# Altium PCB MCUBoard_PCB.PcbDoc
Units mm, origin at the board's own origin, x right, y up, seen from the top; angles counter-clockwise.
Board outline 152.4 x 101.6 mm, 2 copper layers (Top Layer, Bottom Layer); 59 components, 55 nets, 230 pads, 0 vias.
Unrouted connection lines stored in the file: 151.
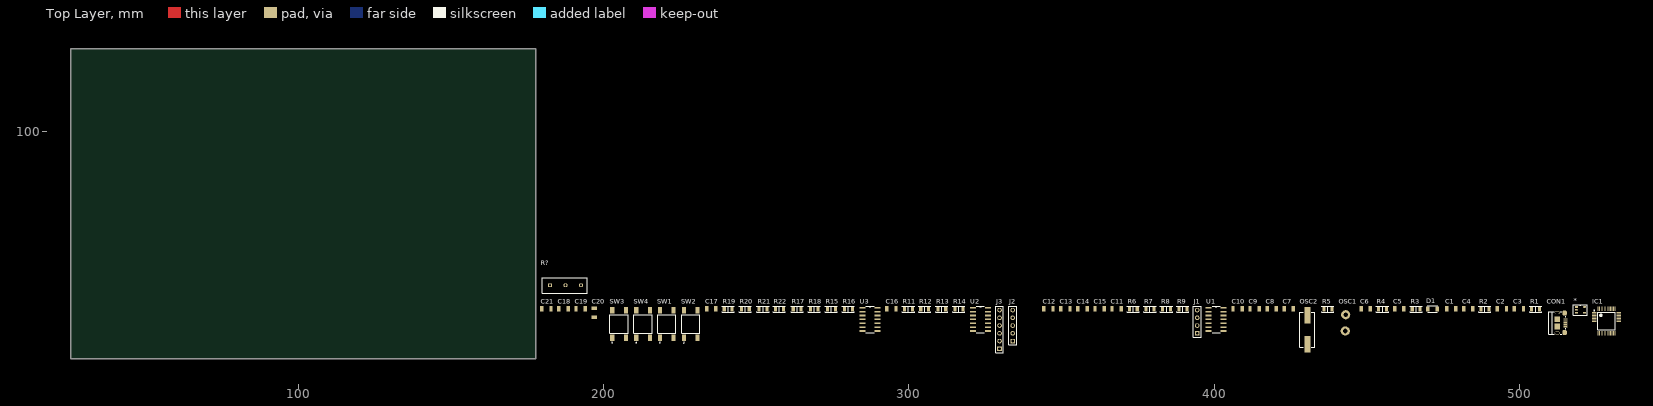
[diagram p0: Top Layer view]
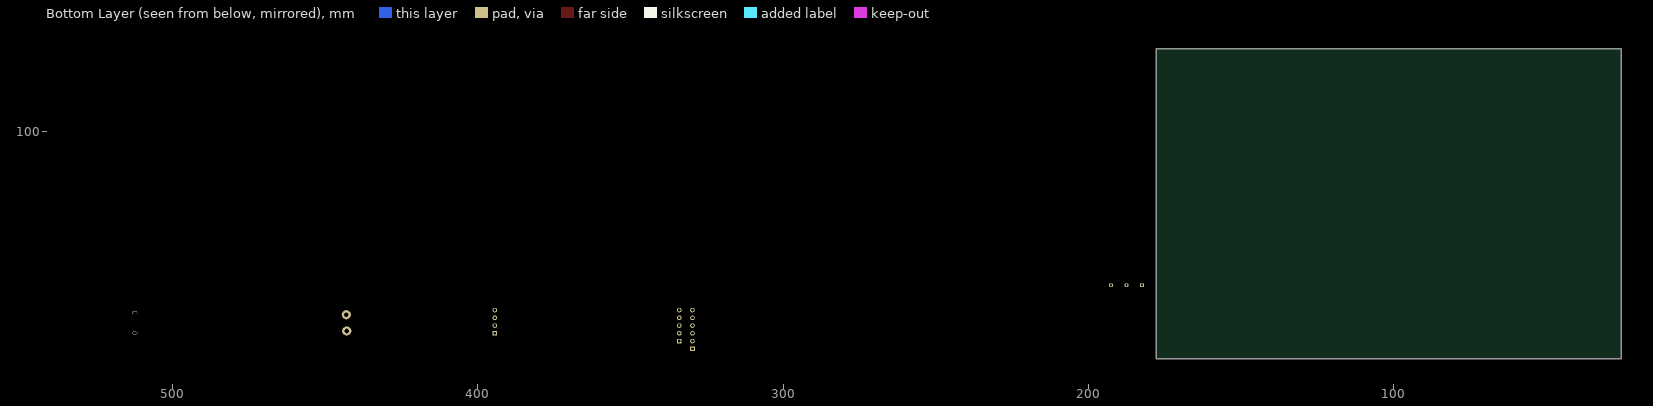
[diagram p1: Bottom Layer view, seen from below]

## Layer stack, top to bottom
Top Solder: solder mask 0.0102, Solder Resist, Dk 3.5
Top Layer: signal copper 0.0356
Dielectric 1: dielectric 0.32, FR-4, Dk 4.8
Bottom Layer: signal copper 0.0356
Bottom Solder: solder mask 0.0102, Solder Resist, Dk 3.5

## Board outline
25.4,25.4 177.8,25.4 177.8,127 25.4,127

## Design rules (kind name [scope] priority, off if disabled: settings)
Clearance [All] p1: gap=0.254 ignorepadtopadclearanceinfootprint=FALSE except(0: Arc-Hole Track-Hole SMDPad-Hole THPad-Hole Via-Hole Fill-Hole Poly-Hole Region-Hole Text-Hole; 0.127: Arc-Arc Arc-Track Track-Track; 0.152: SMDPad-SMDPad; 0.2: Via-Via; 0.5: THPad-THPad; 0.54: Arc-THPad Track-THPad)
PolygonConnect [All] p1: connectstyle=Relief reliefconductorwidth=0.254 reliefentries=4 polygonreliefangle="90 Angle" airgapwidth=0.254
RoutingVias [All] p1: holewidth=0.711 width=1.27 viastyle="Through Hole" minholewidth=0.711 minwidth=1.27 maxholewidth=0.711 maxwidth=1.27
SolderMaskExpansion [All] p1: expansion=0.102
Width [All] p1: maxlimit=0.5 minlimit=0.254 preferedwidth=0.3
30 further rules are at their usual default settings.

## Components (designator, comment, footprint, x,y, rotation, side; value= is the part's Value field where it differs from the comment)
* "LP2985_3.3V_Regulator" LP2985_3v3V_Regulator 518.668,42.418 r0 top
C1 "100nF" SMD_1206 475.488,40.767 r0 top
C2 "1uF" SMD_1206 492.125,40.767 r0 top
C3 "10uF" SMD_1206 497.713,40.767 r0 top
C4 "100nF" SMD_1206 481.076,40.767 r0 top
C5 "22nF" SMD_1206 458.47,40.767 r0 top
C6 "1206" SMD_1206 447.548,40.767 r0 top
C7 "20pF" SMD_1206 422.275,40.767 r0 top
C8 "20pF" SMD_1206 416.687,40.767 r0 top
C9 "100nF" SMD_1206 411.099,40.767 r0 top
C10 "1206" SMD_1206 405.511,40.767 r0 top
C11 "100nF" SMD_1206 365.887,40.767 r0 top
C12 "100nF" SMD_1206 343.535,40.767 r0 top
C13 "100nF" SMD_1206 349.123,40.767 r0 top
C14 "100nF" SMD_1206 354.711,40.767 r0 top
C15 "100nF" SMD_1206 360.299,40.767 r0 top
C16 "100nF" SMD_1206 292.1,40.767 r0 top
C17 "100nF" SMD_1206 233.045,40.767 r0 top
C18 "1uF" SMD_1206 184.658,40.767 r0 top
C19 "100nF" SMD_1206 190.246,40.767 r0 top
C20 "100nF" SMD_1206 197.866,38.354 r90 top
C21 "100nF" SMD_1206 179.07,40.767 r0 top
CON1 "USB_micro" USB_Micro 512.445,37.211 r90 top
D1 "LED" LED_SMD_1206 471.551,41.783 r0 top
IC1 "STM32F103C8" STM32F103C8 528.574,37.846 r0 top
J1 "Header 4x1" "Header 4x1" 394.462,33.782 r90 top
J2 "Header 5x1" "Header 5x1 Female" 334.01,31.242 r90 top
J3 "Header 6x1" "Header 6x1 female" 329.692,28.702 r90 top
OSC1 "32.768Khz" Cristal_small 442.976,34.544 r90 top
OSC2 "8Mhz" CRISTAL_SMD 430.53,34.925 r90 top
R1 "20R" RES_SMD_1206 505.333,41.656 r0 top
R2 "20R" RES_SMD_1206 488.696,41.656 r0 top
R3 "4.7K" RES_SMD_1206 466.217,41.656 r0 top
R4 "1K" RES_SMD_1206 455.168,41.656 r0 top
R5 "1M" RES_SMD_1206 437.261,41.656 r0 top
R6 "10K" RES_SMD_1206 373.507,41.656 r0 top
R7 "10K" RES_SMD_1206 378.968,41.656 r0 top
R8 "10K" RES_SMD_1206 384.429,41.656 r0 top
R9 "10K" RES_SMD_1206 389.763,41.656 r0 top
R11 "10K" RES_SMD_1206 299.847,41.656 r0 top
R12 "10K" RES_SMD_1206 305.181,41.656 r0 top
R13 "10K" RES_SMD_1206 310.769,41.656 r0 top
R14 "10K" RES_SMD_1206 316.357,41.656 r0 top
R15 "10K" RES_SMD_1206 274.574,41.656 r0 top
R16 "10K" RES_SMD_1206 280.162,41.656 r0 top
R17 "10K" RES_SMD_1206 263.398,41.656 r0 top
R18 "10K" RES_SMD_1206 268.986,41.656 r0 top
R19 "10K" RES_SMD_1206 240.792,41.656 r0 top
R20 "10K" RES_SMD_1206 246.38,41.656 r0 top
R21 "10K" RES_SMD_1206 252.222,41.656 r0 top
R22 "10K" RES_SMD_1206 257.556,41.656 r0 top
R? "10K" POT 182.372,49.53 r0 top
SW1 "DIP_4_pin" SMD_4_PIN 220.726,36.83 r90 top
SW2 "DIP_4_pin" SMD_4_PIN 228.6,36.83 r90 top
SW3 "DIP_4_pin" SMD_4_PIN 205.105,36.83 r90 top
SW4 "DIP_4_pin" SMD_4_PIN 212.979,36.83 r90 top
U1 "74HC125" 74HC125 400.812,38.354 r0 top
U2 "74HC125" 74HC125 323.596,38.354 r0 top
U3 "74HC125" 74HC125 287.401,38.354 r0 top

## Footprints (in the part's own frame and the unit in brackets; to place one, negate y for a bottom-side part, rotate by r counter-clockwise, add the part's x,y. Pads: shape width x height; smd on the part's side, far side on the other; paste and mask are expansions set on the pad)
74HC125 [mil]
  rect 78x21 smd: 1(-102.98,149.84) 2(-102.98,99.84) 3(-102.98,49.84) 4(-102.98,-0.16) 5(-102.98,-50.16) 6(-102.98,-100.16) 7(-102.98,-150.16) 8(91.02,-150.16) 9(91.02,-100.16) 10(91.02,-50.16) 11(91.02,-0.16) 12(91.02,49.84) 13(91.02,99.84) 14(91.02,149.84)
  silkscreen extent -58,-172 46,172, body extent -122,-168 106,168, height 69
Cristal_small [mm]
  round 3 hole 1.5: 1(0,0) 2(5.334,-0.127)
  body extent -2.86,-2.32 8.19,2.33, height 13.46
CRISTAL_SMD [mm]
  rect 5.5x2 smd: 1(-4.75,0) 2(4.75,0)
  silkscreen extent -5.7,-2.4 5.7,2.4, body extent -6.73,-2.22 6.47,2.48, height 2.6
"Header 4x1" [mm]
  rect 1.5x1.5 hole 0.9: 1(0,0)
  round 1.5 hole 0.9: 2(2.54,0) 3(5.08,0) 4(7.62,0)
  silkscreen extent -1.27,-1.27 8.89,1.27, body extent -1.27,-1.27 8.89,1.27, height 9.5
"Header 5x1 Female" [mm]
  rect 1.5x1.5 hole 0.9: 1(0,0)
  round 1.5 hole 0.9: 2(2.54,0) 3(5.08,0) 4(7.62,0) 5(10.16,0)
  silkscreen extent -1.27,-1.27 11.43,1.27, body extent -1.52,-1.27 11.68,1.27, height 8.55
"Header 6x1 female" [mm]
  rect 1.5x1.5 hole 0.9: 1(0,0)
  round 1.5 hole 0.9: 2(2.54,0) 3(5.08,0) 4(7.62,0) 5(10.16,0) 6(12.7,0)
  silkscreen extent -1.27,-1.27 13.97,1.27, body extent -1.52,-1.27 14.22,1.27, height 8.55
LED_SMD_1206 [mm]
  rect 1.1x1.73 smd: 1(-1.51,0) 2(1.51,0)
  silkscreen extent -1.65,-1.04 1.65,1.04, body extent -1.6,-0.8 1.6,0.8, height 1.1
LP2985_3v3V_Regulator [mm]
  rect 1x0.55 smd: 1(0,0)
  oval 1x0.55 smd: 2(0,-0.95) 3(0,-1.9) 4(2.7,-1.9) 5(2.7,0)
  silkscreen extent -1.02,-2.67 3.56,0.76, body extent -0.15,-2.52 2.69,0.48, height 1.2
POT [mm]
  rect 1.4x1.2 hole 0.7: 1(0,0)
  oval 1.4x1.2 hole 0.7: 2(5.08,0) 3(10.16,0)
  silkscreen extent -2.54,-2.6 12.32,2.54, body extent -3.17,-22.48 13.07,5.72, height 22.12
RES_SMD_1206 [mm]
  rect 1x1.55 smd: 1(-1.3,0) 2(1.3,0)
  silkscreen extent -2,-1 2,1, body extent -1.57,-0.8 1.62,0.8, height 0.6
SMD_4_PIN [mm]
  rect 2.1x1.38 smd: 1(-4.525,2.319) 2(4.575,2.319) 3(-4.525,-2.161) 4(4.575,-2.161)
  silkscreen extent -6.23,-2.92 3.03,3.08, body extent -4.98,-3 5.03,3, height 5.13
SMD_1206 [mil]
  rect 44x71 smd: 1(26.28,38.74) 2(144.28,38.74)
  body extent 16,4 150,75, height 34
STM32F103C8 [mm]
  oval 1.55x0.25 smd: 1(-4.025,2.75) 2(-4.025,2.25) 3(-4.025,1.75) 4(-4.025,1.25) 5(-4.025,0.75) 6(-4.025,0.25) 7(-4.025,-0.25) 8(-4.025,-0.75) 9(-4.025,-1.25) 10(-4.025,-1.75) 11(-4.025,-2.25) 12(-4.025,-2.75) 25(4.025,-2.75) 26(4.025,-2.25) 27(4.025,-1.75) 28(4.025,-1.25) 29(4.025,-0.75) 30(4.025,-0.25) 31(4.025,0.25) 32(4.025,0.75) 33(4.025,1.25) 34(4.025,1.75) 35(4.025,2.25) 36(4.025,2.75)
  oval 0.25x1.55 smd: 13(-2.75,-4.025) 14(-2.25,-4.025) 15(-1.75,-4.025) 16(-1.25,-4.025) 17(-0.75,-4.025) 18(-0.25,-4.025) 19(0.25,-4.025) 20(0.75,-4.025) 21(1.25,-4.025) 22(1.75,-4.025) 23(2.25,-4.025) 24(2.75,-4.025) 37(2.75,4.025) 38(2.25,4.025) 39(1.75,4.025) 40(1.25,4.025) 41(0.75,4.025) 42(0.25,4.025) 43(-0.25,4.025) 44(-0.75,4.025) 45(-1.25,4.025) 46(-1.75,4.025) 47(-2.25,4.025) 48(-2.75,4.025)
  silkscreen extent -4.15,-2.85 2.85,3.55, body extent -4.5,-4.5 4.5,4.5, height 1.5
USB_Micro [mm]
  oval 0.4x1.35 smd: 1(1.3,-2.625) 2(0.65,-2.625) 3(0,-2.625) 4(-0.65,-2.625) 5(-1.3,-2.625)
  oval 0.9x1.6 hole 0.5 slot 1.2 at 90 deg: S(-3.3,0.05) S(3.3,0.05)
  rrect50% 1.6x1.4 smd: S(-3.2,-2.4) S(3.2,-2.4)
  rect 1.9x1.8 smd: S(-1.2,0.05) S(1.2,0.05)
  silkscreen extent -3.7,-2.8 3.7,2.8, body extent -3.93,-2.9 3.93,2.76, height 2.78

## Part data
C1 C2 C3 C4 C5 C6 C7 C8 C9 C10 C11 C12 C13 C14 C15 C16 C17 C18 C19 C20 C21: library part SMD_1206
OSC1: library part Cristal_small
OSC2: library part Cristal
R1 R2 R3 R4 R5 R6 R7 R8 R9 R11 R12 R13 R14 R15 R16 R17 R18 R19 R20 R21 R22: library part RES
R?: library part Pot
U1 U2 U3: "74HC125 - SMD"

## Nets (pads, with @x,y where several pads share a name; then routed paths per layer and width w, separated by ;. In a path a pad name is that pad's centre, name@x,y a point inside that pad or via, vN(x,y) a via of type N, cw(c..) or ccw(c..) an arc to the next point about the centre after c; other vN are vias at no path point)
+5: *.1 *.3 C1.2 C2.2 CON1.1 R3.1
+5_Ex_Source: C11.2 C16.2 C17.2 J2.1 R6.2 R7.2 R8.2 R9.2 R11.2 R12.2 R13.2 R14.2 R19.2 R20.2 R21.2 R22.2 R?.1 U1.14 U2.14 U3.14
A11: U2.8
A12: U2.11
A15: IC1.38 U3.3
AH: J3.1 U3.6
AL: J3.2 U1.3
B3: IC1.39 U2.3
B4: IC1.40 U2.6
B6: IC1.42 R21.1 U3.5
B7: IC1.43 R20.1 U3.9
B8: IC1.45 R19.1 U3.12
B12: IC1.25 R9.1 U1.2
B13: IC1.26 R8.1 U1.5
B14: IC1.27 R7.1 U1.9
B15: IC1.28 U1.11
BH: J3.3 U3.8
BL: J3.4 U1.6
CH: J3.5 U3.11
CL: J3.6 U1.8
Cw-Ccw: R13.1 R18.1 SW4.1 U2.5
GND: *.2 C1.1 C2.1 C3.1 C4.1 C5.1 C6.1 C7.1 C8.1 C9.1 C10.2 C11.1 C12.1 C13.1 C14.1 C15.1 C16.1 C17.1 CON1.4 CON1.S IC1.8 IC1.20 IC1.23 IC1.35 IC1.44 IC1.47 J1.4 J2.5 R4.1 R?.2 SW1.3 SW2.3 SW3.3 SW4.3 U1.1 U1.4 U1.7 U1.10 U1.13 U2.1 U2.4 U2.7 U2.10 U2.13 U3.1 U3.4 U3.7 U3.10 U3.13
HallA: J2.2 R12.1 U2.9
HallB: J2.3 R11.1 U2.12
HallC: J2.4 R22.1 U3.2
MotorMode: R6.1 R16.1 SW2.1 U1.12
Net*_4: *.4 C5.2
NetC6_2: C6.2 OSC2.1 R5.2
NetC7_2: C7.2 OSC1.2
NetC8_2: C8.2 OSC1.1
NetC10_1: C10.1 OSC2.2 R5.1
NetC18_1: C18.1 SW1.2
NetC18_2: C18.2 SW1.4
NetC19_1: C19.1 SW3.2
NetC19_2: C19.2 SW3.4
NetC20_1: C20.1 SW2.2
NetC20_2: C20.2 SW2.4
NetC21_1: C21.1 SW4.2
NetC21_2: C21.2 SW4.4
NetCON1_2: CON1.2 R1.1
NetCON1_3: CON1.3 R2.1
NetD1_2: D1.2 R4.2
PA11_N: IC1.32 R1.2
PA12_P: IC1.33 R2.2 R3.2
PC14: IC1.3
PC15: IC1.4
PD0: IC1.5
PD1: IC1.6
Pot: IC1.11 R?.3
RESET: IC1.7 R15.1 SW1.1
Start_Stop: R14.1 R17.1 SW3.1 U2.2
SWDCLK: IC1.37 J1.3
SWDIO: IC1.34 J1.2
VCC3V3: C9.2 J1.1
VCC_3V3: *.5 C3.2 C4.2 C12.2 C13.2 C14.2 C15.2 D1.1 IC1.9 IC1.24 IC1.36 IC1.48 R15.2 R16.2 R17.2 R18.2
pads on no net: CON1.5 IC1.1 IC1.2 IC1.10 IC1.12 IC1.13 IC1.14 IC1.15 IC1.16 IC1.17 IC1.18 IC1.19 IC1.21 IC1.22 IC1.29 IC1.30 IC1.31 IC1.41 IC1.46